# EAGLE board SerLCD_16x2_PF-v01 (EAGLE 7.6.0)

Size 73.66 x 99.06 mm. Coordinates in mm from the lower left corner, seen from the top.
Outline: 2.54,0 arc-90 0,2.54 0,96.52 arc-90 2.54,99.06 71.12,99.06 arc-90 73.66,96.52 73.66,2.54 arc-90 71.12,0 2.54,0
Outline: 20.32,90.68 20.32,88.9 21.08,88.9 21.08,11.43 20.32,11.43 20.32,9.65 58.42,9.65 58.42,11.43 57.66,11.43 57.66,88.9 58.42,88.9 58.42,90.68 20.32,90.68
Copper layers (1*16): Top 0.035mm / dielectric 1.5mm / Bottom 0.035mm
Design rules "SparkFun-2-layer-TIGHT *": minimum track width 10mil, minimum drill 15mil, track to track 7mil, track to pad 7mil, pad to pad 7mil, via to via 7mil, smd to smd 7mil, copper to edge 7mil, drill to drill 7mil, minimum pad ring 7mil, minimum via ring 7mil, stop-mask expansion 4mil, vias tented up to drill 25mil, thermal gap 10mil
Net classes: 1 vcc1: width 0.203 mm; 3 VCC2: width 0.381 mm, drill 0.508 mm, clearance 0.254 mm to class 0; 8 eight_mil: width 0.203 mm, clearance 0.127 mm; 9 twelve_mil: width 0.305 mm, clearance 0.127 mm; 10 twenty_mil: width 0.508 mm, clearance 0.127 mm; 11 thirty_mil: width 0.762 mm, clearance 0.127 mm; 13 20_mil: width 0.508 mm, drill 0.508 mm

## Footprints (pad centres in the part's own frame; a part is rotated, then mirrored left to right if it is on the bottom)
STAND-OFF-TIGHT = hole 3.048: 0,0
GOLD_HINGE_PM = hole 6.35: 14.224,4.051; 14.224,15.197 | hole 2.794: 3.81,4.077; 3.81,15.07

## Placement (x,y rotation side)
U$2  [SRE_LCD_16X2_REF_ONLY]  57.15,10.16 90 top
U$3  [STAND-OFF-TIGHT]  69.85,95.25 0 top
U$6  GOLD_HINDGEPM+PF  [GOLD_HINGE_PM]  0,80.01 0 top
U$7  GOLD_HINDGEPM+PF  [GOLD_HINGE_PM]  0,0 0 top
U$8  [STAND-OFF-TIGHT]  69.85,3.81 0 top

## Library data of the parts
U$2 = SerLCD_dimensions
U$3 U$8 = SparkFun
U$6 U$7 = Testing

## Text on the board
Bottom: v01 (11/15/2016) Plewis
Dimension: ROUTE OUT | ROUTE OUT | ROUTE OUT
tPlace: PF | Serial LCD 16x2 | #579